# EAGLE board dc-motor-driver (EAGLE 4.16)
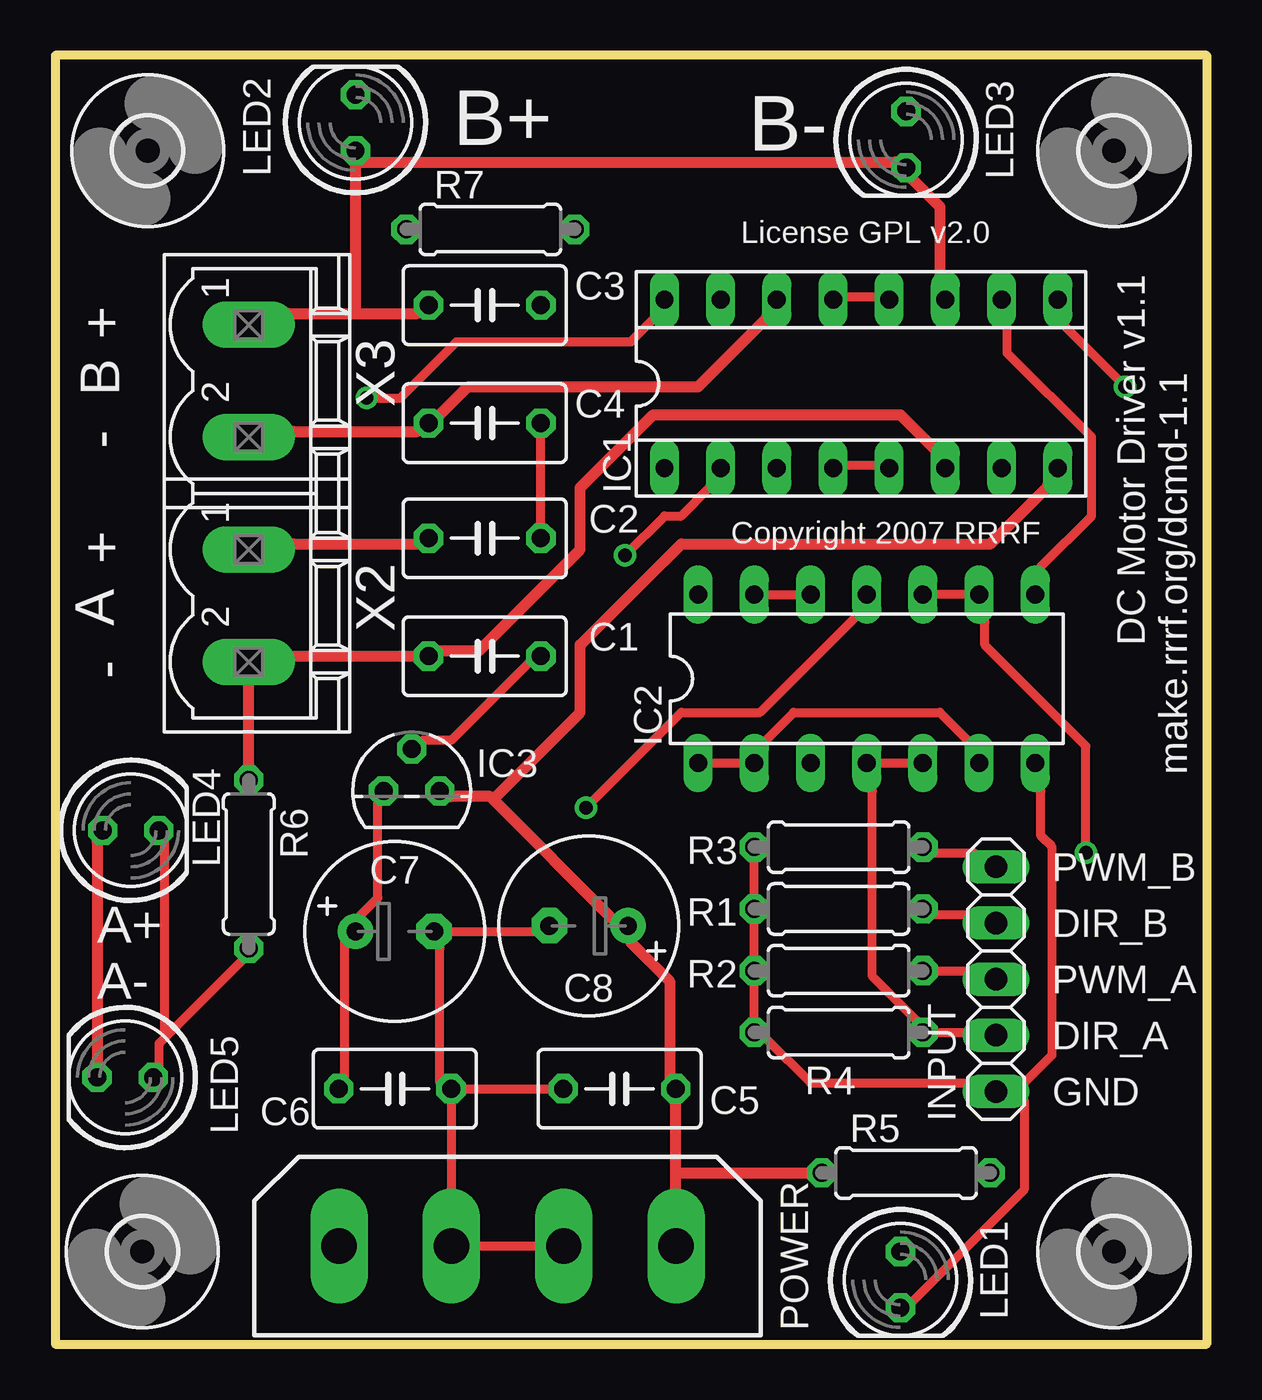
[diagram p0: board, top side]
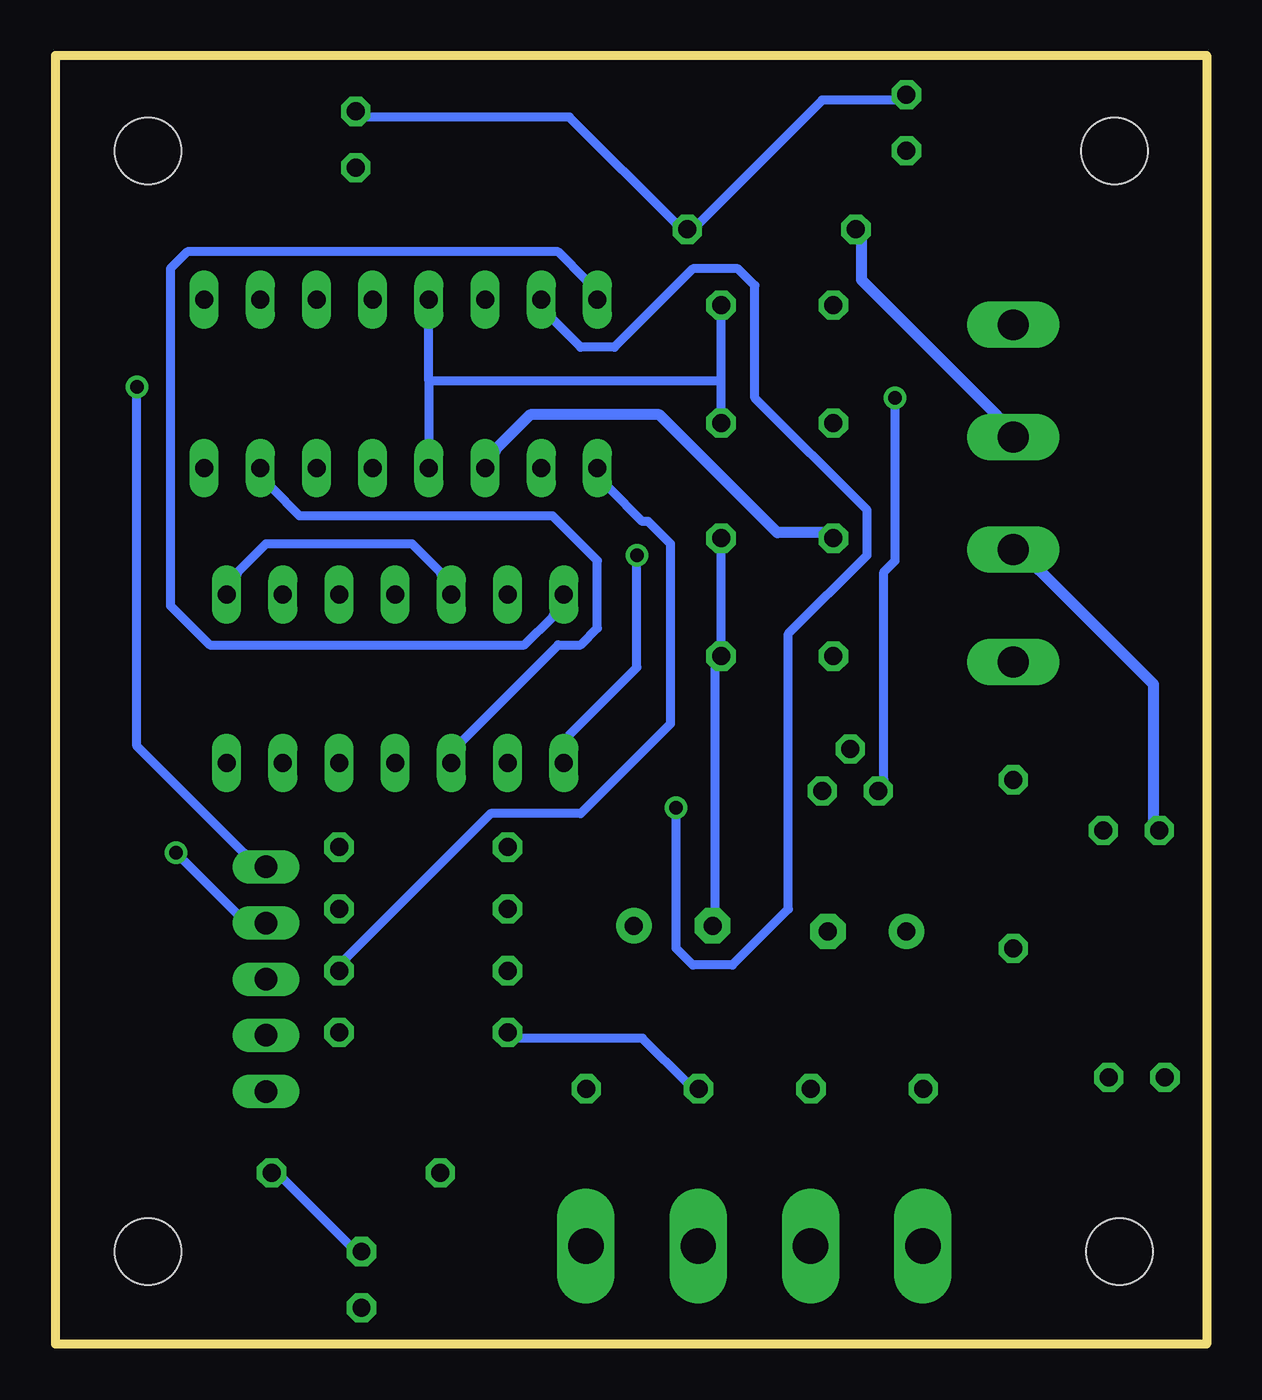
[diagram p1: board, bottom side, seen from below]

Size 52.05 x 58.29 mm. Coordinates in mm from the lower left corner, seen from the top.
Outline: 52.05,58.29 0,58.29 0,0 52.05,0 52.05,58.29
Copper layers (1*16): Top 0.035mm / dielectric 1.5mm / Bottom 0.035mm
Design rules "default": minimum track width 10mil, minimum drill 24mil, track to track 8mil, track to pad 8mil, pad to pad 8mil, via to via 8mil, smd to smd 8mil, copper to edge 40mil, drill to drill 8mil, minimum pad ring 10mil, minimum via ring 8mil, stop-mask expansion 4mil, vias tented up to drill 0mil, thermal gap 10mil
Net classes: 0 default: width 0.406 mm, drill 0.635 mm; 1 power: width 0.508 mm, drill 0.635 mm

## Footprints (pad centres in the part's own frame; a part is rotated, then mirrored left to right if it is on the bottom)
C050-035X075 = drill 0.813 octagon: 1 -2.54,0; 2 2.54,0
E3,5-8 = drill 0.813 pad 1.6 round: + -1.778,0 | drill 0.813 pad 1.6 octagon: - 1.778,0
3,0 = hole 3: 0,0
SOCKED-16 = drill 0.813 long: 1 -8.89,-3.81; 2 -6.35,-3.81; 3 -3.81,-3.81; 4 -1.27,-3.81; 5 1.27,-3.81; 6 3.81,-3.81; 7 6.35,-3.81; 8 8.89,-3.81; 9 8.89,3.81; 10 6.35,3.81; 11 3.81,3.81; 12 1.27,3.81; 13 -1.27,3.81; 14 -3.81,3.81; 15 -6.35,3.81; 16 -8.89,3.81
DIL14 = drill 0.813 long: 1 -7.62,-3.81; 2 -5.08,-3.81; 3 -2.54,-3.81; 4 0,-3.81; 5 2.54,-3.81; 6 5.08,-3.81; 7 7.62,-3.81; 8 7.62,3.81; 9 5.08,3.81; 10 2.54,3.81; 11 0,3.81; 12 -2.54,3.81; 13 -5.08,3.81; 14 -7.62,3.81
TO92 = drill 0.813 octagon: 1 -1.27,0; 2 0,1.905; 3 1.27,0
1X05 = drill 1.016 long: 1 -5.08,0; 2 -2.54,0; 3 0,0; 4 2.54,0; 5 5.08,0
LED5MM = drill 0.813 octagon: A -1.27,0; K 1.27,0
9090-4V = drill 1.6 pad 2.6 long: 1 -7.62,0; 2 -2.54,0; 3 2.54,0; 4 7.62,0
0207/7 = drill 0.813 octagon: 1 -3.81,0; 2 3.81,0
MSTBV2 = drill 1.397 long: 1 -2.54,0; 2 2.54,0

## Placement (x,y rotation side)
C1  100nF  [C050-035X075]  19.41,31.11 0 top
C2  100nF  [C050-035X075]  19.41,36.45 0 top
C3  100nF  [C050-035X075]  19.41,46.99 0 top
C4  100nF  [C050-035X075]  19.41,41.66 0 top
C5  100nF  [C050-035X075]  25.51,11.56 180 top
C6  100nF  [C050-035X075]  15.35,11.56 0 top
C7  100uF  [E3,5-8]  15.35,18.67 0 top
C8  100uF  [E3,5-8]  24.11,18.92 180 top
H1  MOUNT-HOLE3.0  [3,0]  3.94,4.19 0 top
H2  MOUNT-HOLE3.0  [3,0]  47.86,4.19 0 top
H3  MOUNT-HOLE3.0  [3,0]  47.86,53.98 0 top
H4  MOUNT-HOLE3.0  [3,0]  4.17,53.98 0 top
IC1  L293D  [SOCKED-16]  36.43,43.43 0 top
IC2  74HC00N  [DIL14]  36.69,30.1 0 top
IC3  78L05Z  [TO92]  16.11,25.02 0 top
INPUT  [1X05]  42.53,16.51 90 top
LED1  [LED5MM]  38.21,2.92 270 top
LED2  [LED5MM]  13.57,55.24 90 top
LED3  [LED5MM]  38.46,54.48 270 top
LED4  [LED5MM]  3.41,23.24 0 top
LED5  [LED5MM]  3.16,12.06 180 top
POWER  9090-4V  [9090-4V]  20.45,4.45 0 top
R1  100K  [0207/7]  35.42,19.68 180 top
R2  100K  [0207/7]  35.42,16.89 180 top
R3  100K  [0207/7]  35.42,22.48 180 top
R4  100K  [0207/7]  35.42,14.1 180 top
R5  560  [0207/7]  38.46,7.75 180 top
R6  560  [0207/7]  8.75,21.72 270 top
R7  560  [0207/7]  19.67,50.42 0 top
X2  MST2V  [MSTBV2]  8.75,33.4 270 top
X3  MST2V  [MSTBV2]  8.75,43.56 270 top

## Library data of the parts
C1-C8 R1-R7 = rcl
H1-H4 = holes
IC1 = ic-package
IC2 = 74xx-eu
IC3 = linear
INPUT = pinhead
LED1-LED5 = led
POWER = con-thomas-betts
X2 X3 = con-phoenix-508

## Nets
DIR_A: IC2.4 IC2.5 INPUT.2 R4.1
DIR_B: IC2.9 IC2.10 INPUT.4 R1.1
GND: C1.2 C2.2 C3.2 C4.2 C5.2 C6.2 C7.- C8.- IC1.4 IC1.5 IC1.12 IC1.13 IC2.7 IC3.2 INPUT.1 LED1.K POWER.2 POWER.3 R1.2 R2.2 R3.2 R4.2
N$1: IC1.7 IC2.3
N$2: IC1.2 IC2.1 IC2.2 IC2.6
N$3: IC1.15 IC2.11
N$4: IC1.10 IC2.8 IC2.12 IC2.13
N$5: LED1.A R5.1
N$6: LED2.K LED3.A R7.2
N$8: LED4.K LED5.A R6.2
OUTA_1 [power]: C2.1 IC1.3 LED4.A LED5.K X2.1
OUTA_2 [power]: C1.1 IC1.6 R6.1 X2.2
OUTB_1 [power]: C3.1 IC1.11 LED2.A LED3.K X3.1
OUTB_2 [power]: C4.1 IC1.14 R7.1 X3.2
PWM_A: IC1.1 INPUT.3 R2.1
PWM_B: IC1.9 INPUT.5 R3.1
VCC: C6.1 C7.+ IC1.16 IC2.14 IC3.1
VSS [power]: C5.1 C8.+ IC1.8 IC3.3 POWER.4 R5.2

## Tracks (layer width: path | path; a pad name or v marks a point on that pad's centre or on a via)
DIR_A
  Top 0.406: IC2.5 IC2.4 36.94,25.02 36.94,16.64 38.97,14.6 R4.1 41.26,14.1 INPUT.2
DIR_B  (via drill 0.61)
  Top 0.406: IC2.10 IC2.9 42.02,32.64 42.02,31.62 46.59,27.05 v46.59,22.22 | R1.1 39.73,19.43 41.26,19.43 INPUT.4
  Bottom 0.406: v46.59,22.22 43.8,19.43 INPUT.4
GND
  Top 0.406: IC1.4 35.67,39.75 37.19,39.75 IC1.5 | IC1.13 35.67,47.37 37.19,47.37 IC1.12 | IC3.2 16.62,27.3 17.89,27.3 21.45,30.86 C1.2 | C2.2 C4.2 | LED1.K 38.72,1.91 43.8,6.98 43.8,11.05 INPUT.1 | IC2.7 44.56,25.02 44.56,22.99 45.07,22.48 45.07,13.08 43.8,11.81 INPUT.1 | R3.2 R1.2 R2.2 R4.2 32.11,13.84 34.15,11.81 41.26,11.81 INPUT.1 | C8.- 21.7,18.67 C7.- 17.38,17.91 17.38,11.81 C6.2 | C6.2 C5.2 | C6.2 17.89,6.98 POWER.2 POWER.3
  Bottom 0.406: 35.16,43.56 IC1.4 | 35.16,43.56 IC1.13 | 21.95,43.56 C3.2 | C4.2 21.95,43.56 | C2.2 C1.2 22.21,30.61 22.21,19.68 C8.- | 21.95,43.56 35.16,43.56 | R4.2 31.1,13.84 25.51,13.84 23.48,11.81 C5.2
N$1
  Bottom 0.406: IC2.3 33.64,27.3 29.32,31.62 28.3,31.62 27.54,32.38 27.54,35.43 29.57,37.47 41,37.47 42.27,38.73 IC1.7
N$2  (via drill 0.61)
  Top 0.406: IC2.1 IC2.2 32.11,27.3 33.38,28.57 39.99,28.57 41.26,27.3 IC2.6 | v25.76,35.69 27.54,37.47 28.3,37.47 29.57,38.73 IC1.2
  Bottom 0.406: v25.76,35.69 25.76,30.61 28.81,27.56 IC2.1
N$3  (via drill 0.61)
  Top 0.406: v23.99,24.26 28.3,28.57 31.86,28.57 36.18,32.89 IC2.11
  Bottom 0.406: v23.99,24.26 23.99,17.91 23.22,17.14 21.45,17.14 18.91,19.68 18.91,32.13 15.35,35.69 15.35,37.72 20.43,42.8 20.43,47.88 21.19,48.64 23.22,48.64 26.78,45.09 28.3,45.09 29.57,46.35 IC1.15
N$4
  Top 0.406: IC2.13 IC2.12 | IC1.10 43.04,46.1 43.04,44.83 46.85,41.02 46.85,37.47 44.56,35.18 IC2.8
  Bottom 0.406: IC2.8 43.8,34.92 42.53,36.2 35.92,36.2 34.65,34.92 IC2.12
N$5
  Bottom 0.406: LED1.A 38.72,4.45 41.77,7.49 R5.1
N$6
  Bottom 0.406: LED2.K 14.08,56.26 17.38,56.26 22.97,50.67 R7.2 23.99,50.67 28.81,55.5 37.96,55.5 LED3.A
N$8
  Top 0.406: 5.06,13.97 8.49,17.4 R6.2 | 5.06,13.97 4.68,13.59 4.68,12.57 LED5.A | LED4.K 4.94,22.73 4.94,14.1 5.06,13.97
OUTA_1
  Top 0.508: LED5.K 1.89,22.73 LED4.A | C2.1 16.37,36.2 10.78,36.2 X2.1
  Bottom 0.508: IC1.3 32.11,40.51 30.59,42.04 24.75,42.04 19.41,36.7 17.38,36.7 C2.1 | LED4.A 2.4,23.75 2.4,29.84 7.48,34.92 X2.1
OUTA_2
  Top 0.508: R6.1 X2.2 10.78,31.11 C1.1 17.38,31.37 19.16,31.37 23.73,35.94 23.73,38.73 27.03,42.04 38.21,42.04 39.73,40.51 IC1.6
OUTB_1
  Top 0.508: IC1.11 39.99,48.39 39.99,51.44 38.72,52.7 LED3.K 37.96,53.47 13.83,53.47 LED2.A 13.57,46.61 | 13.57,46.61 10.52,46.61 X3.1 | 13.57,46.61 16.37,46.61 C3.1
OUTB_2
  Top 0.508: X3.2 10.78,41.27 16.37,41.27 C4.1 17.38,42.04 18.65,43.31 29.07,43.31 32.11,46.35 IC1.14
  Bottom 0.508: R7.1 15.6,49.91 15.6,48.13 9.51,42.04 X3.2
PWM_A
  Top 0.406: R2.1 41.26,16.89 INPUT.3
  Bottom 0.406: IC1.1 27.03,38.73 25.51,37.21 25.26,37.21 24.24,36.2 24.24,28.07 28.3,24 32.37,24 38.97,17.4 R2.1
PWM_B  (via drill 0.61)
  Top 0.406: R3.1 39.73,22.22 41.51,22.22 INPUT.5 | v48.37,43.31 45.58,46.1 IC1.9
  Bottom 0.406: v48.37,43.31 48.37,27.05 43.54,22.22 INPUT.5
VCC  (via drill 0.61)
  Top 0.406: C6.1 13.06,12.06 13.06,18.16 C7.+ 13.83,19.43 14.59,20.19 14.59,24.51 IC3.1 | v14.08,42.8 15.6,42.8 18.14,45.34 26.02,45.34 27.03,46.35 IC1.16
  Bottom 0.406: IC2.14 29.57,32.89 30.84,31.62 45.07,31.62 46.85,33.4 46.85,48.64 46.08,49.4 29.32,49.4 28.05,48.13 IC1.16 | v14.08,42.8 14.08,35.43 14.59,34.92 14.59,25.53 IC3.1
VSS
  Top 0.508: 28.05,7.75 28.05,6.98 POWER.4 | 28.05,7.75 C5.1 27.8,12.06 27.8,16.38 26.02,18.16 C8.+ 25.26,19.18 19.8,24.64 | 28.05,7.75 R5.2 | 19.8,24.64 19.67,24.77 17.89,24.77 IC3.3 | IC1.8 44.81,38.73 42.27,36.2 28.3,36.2 23.73,31.62 23.73,28.57 19.8,24.64

## Text on the board
tPlace: B+ | B- | License GPL v2.0 | DC Motor Driver v1.1 | + | B | - | Copyright 2007 RRRF | + | A | - | make.rrrf.org/dcmd-1.1 | PWM_B | A+ | DIR_B | PWM_A | A- | DIR_A | GND